# Altium PCB PHY6222_32(0.4)_V1.7.PcbDoc
Units mil, origin at the board's own origin, x right, y up, seen from the top; angles counter-clockwise.
Board outline 2885.32 x 1372.78 mil, 4 copper layers (Top Layer, Signal Layer 1, Signal Layer 2, Bottom Layer), stack 30.634 mil thick; 58 components, 64 nets, 245 pads, 482 vias.
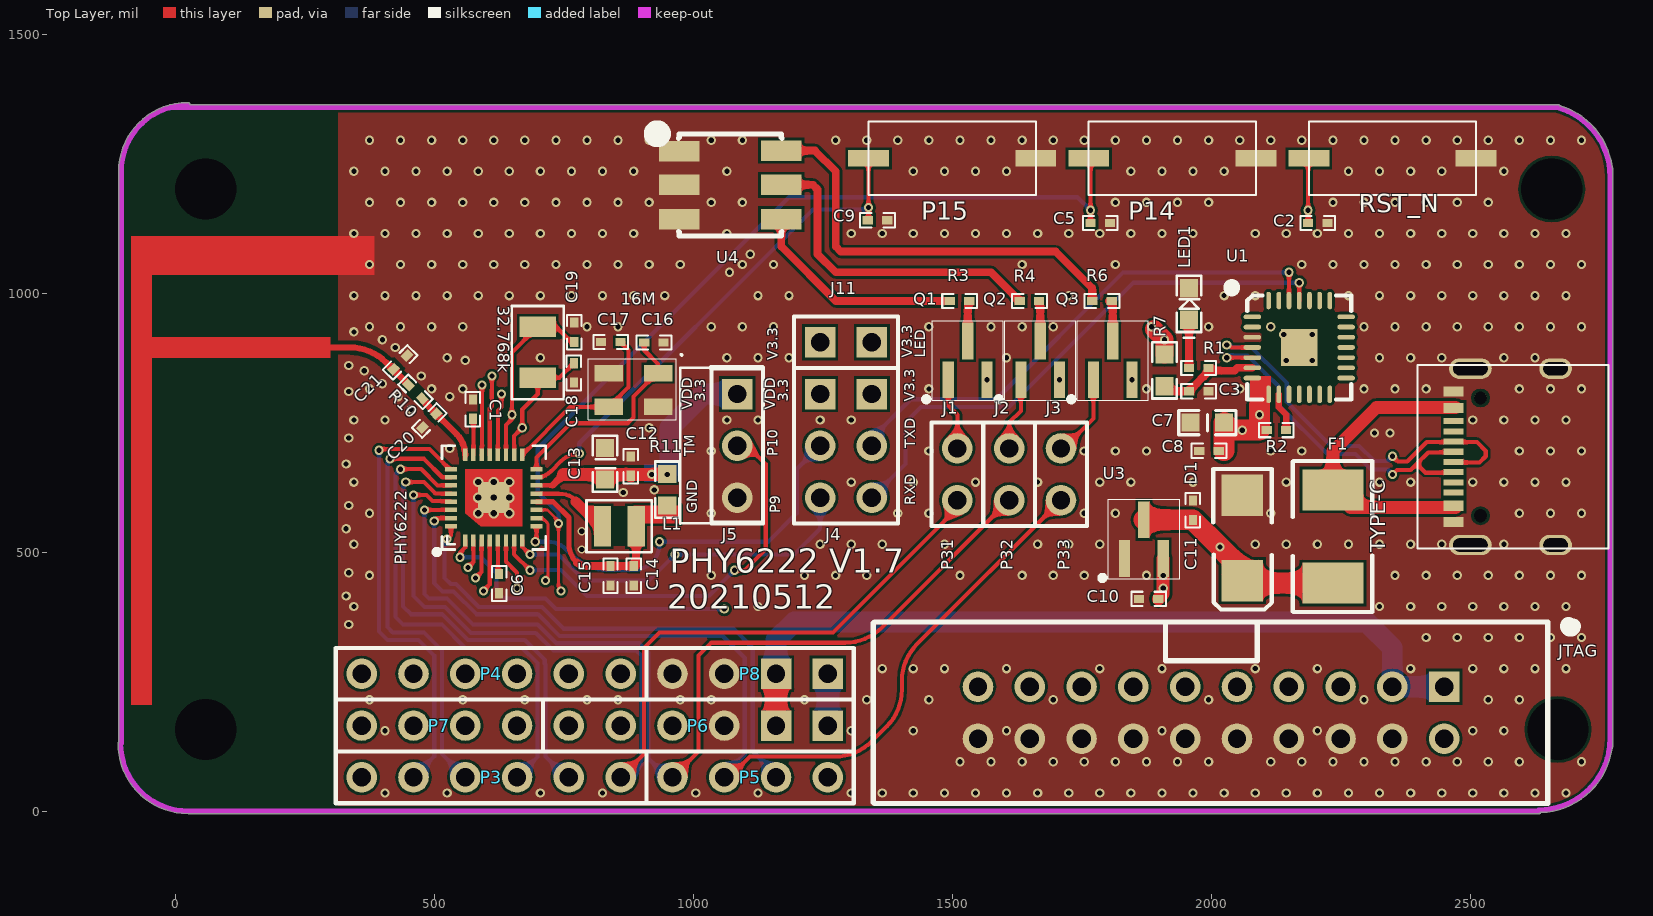
[diagram p0: Top Layer view]
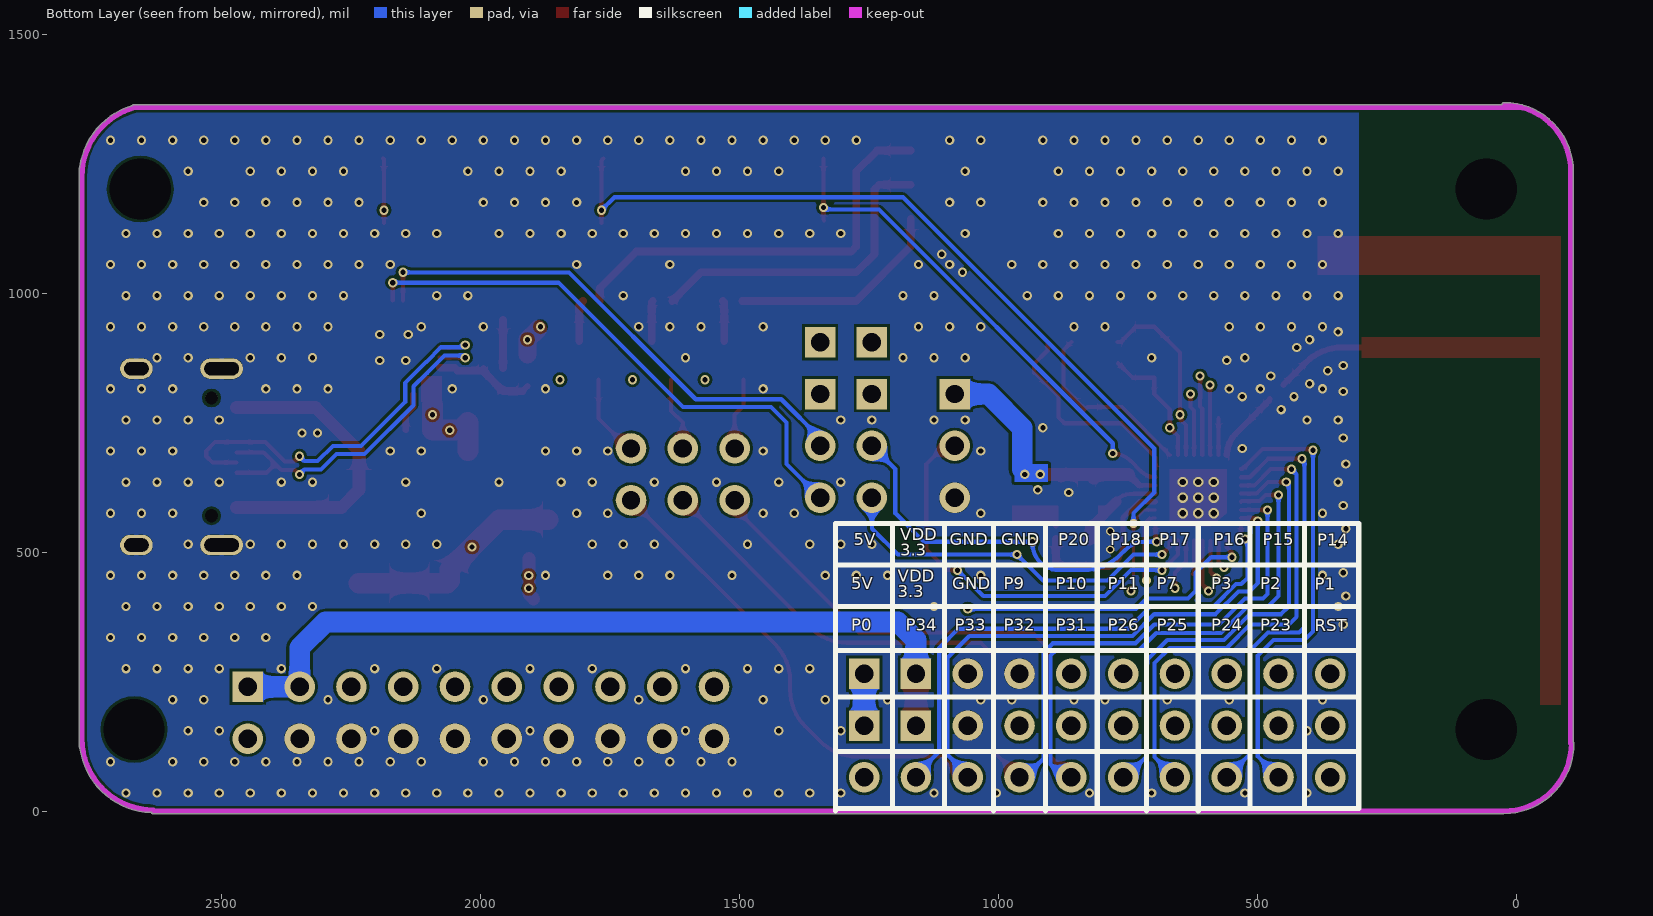
[diagram p1: Bottom Layer view, seen from below]
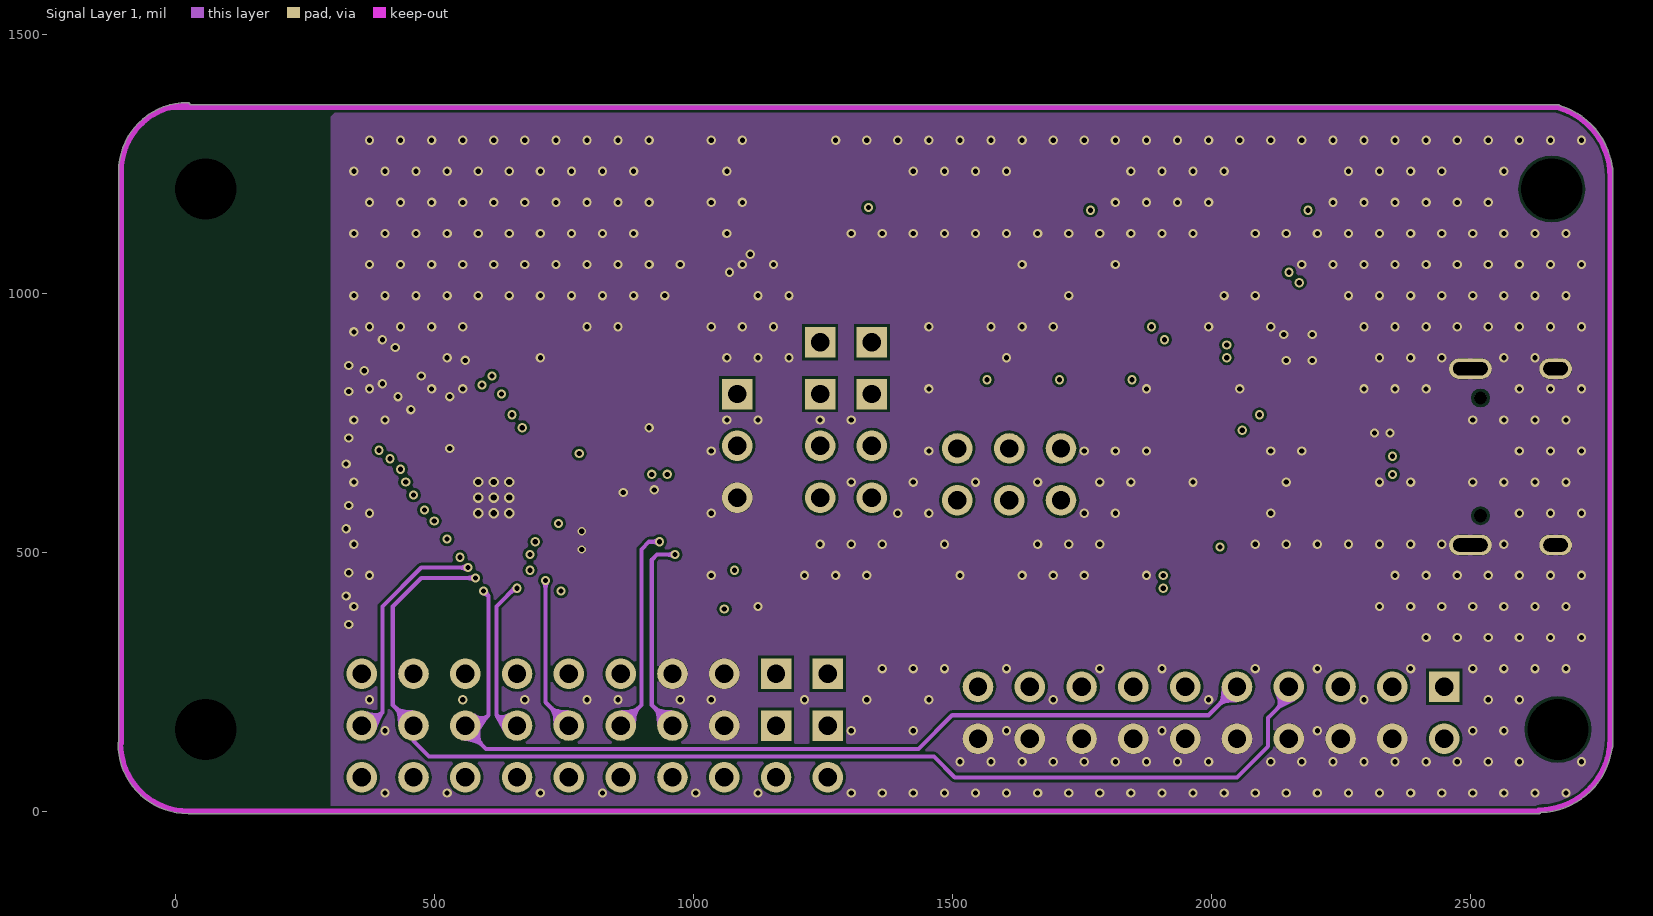
[diagram p2: Signal Layer 1]
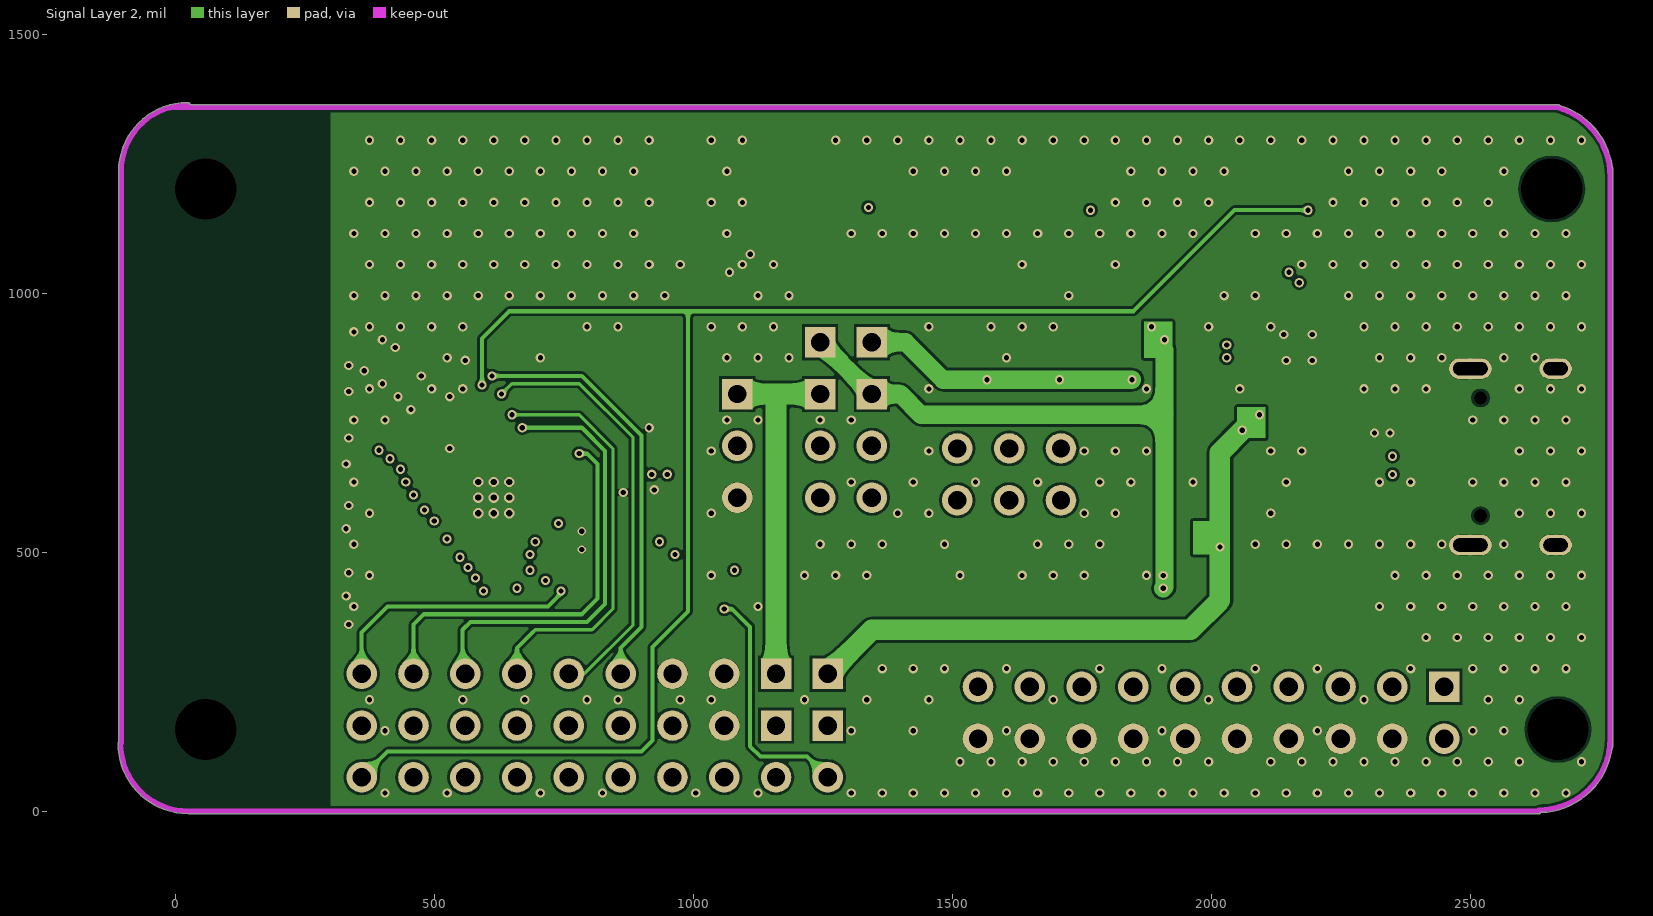
[diagram p3: Signal Layer 2]

## Layer stack, top to bottom
Top Solder: solder mask 0.4, Solder Resist, Dk 3.5
Top Layer: signal copper 1.4
Dielectric 1: core 10, FR-4, Dk 4.2
Signal Layer 1: signal copper 1.417
Dielectric 3: prepreg 5, Dk 4.2
Signal Layer 2: signal copper 1.417
Dielectric 2: core 10, Dk 4.2
Bottom Layer: signal copper 1.4
Bottom Solder: solder mask 0.4, Solder Resist, Dk 3.5

## Board outline
-110.31,130.29 cw(c-105.29,130.29) -109.03,133.64 -109.03,1235 cw(c23.73,1235) -12.03,1362.85 cw(c-10,1358.27) -10.59,1363.25 cw(c23.73,1235) 23.73,1367.76 cw(c23.73,1362.75) 28.72,1363.28 2662.88,1363.28 cw(c2665.13,1358.8) 2666.33,1363.67 cw(c2632.2,1225) 2667.88,1363.28 2670,1363.28 cw(c2670,1358.27) 2673.71,1361.65 cw(c2632.2,1225) 2773.85,1243.22 cw(c2770,1240) 2775.01,1240 2775.01,125 cw(c2770,125) 2773.85,121.78 cw(c2632.2,140) 2636.4,-2.75 cw(c2632.2,0) 2632.2,-5.02 25,-5.02 cw(c25,130.29)

## Design rules (kind name [scope] priority, off if disabled: settings)
Clearance Clearance_2 [All vs InNet('F2')] p1: gap=8
Clearance Clearance_1 [InNet('GND') vs InNet('RF')] p2: gap=8
Clearance [All] p3: gap=5
ComponentClearance [All] p1: gap=10 collisioncheckmode=3 verticalgap=0 showdistances=FALSE
DiffPairsRouting [All] p1: maxlimit=10 minlimit=8 mostfreqgap=10 toplayer_prefgap=8 toplayer_minwidth=8 toplayer_maxwidth=8 toplayer_prefwidth=8 midlayer1_mingap=10 midlayer1_minwidth=15 midlayer1_maxwidth=15 midlayer1_prefwidth=15 midlayer2_mingap=10 midlayer2_minwidth=15 midlayer2_maxwidth=15 midlayer2_prefwidth=15 bottomlayer_prefgap=8 bottomlayer_minwidth=8 bottomlayer_maxwidth=8 bottomlayer_prefwidth=8 maxuncoupledlength=500
HoleSize [All] p1: absolutevalues=TRUE maxlimit=1000 minlimit=1 maxpercent=80.000 minpercent=20.000
MinimumSolderMaskSliver [All] p1: minsoldermaskwidth=0
PlaneConnect [All] p1: planeconnectstyle=Direct reliefexpansion=20 reliefentries=4 reliefconductorwidth=10 reliefairgap=6
PolygonConnect [All vs OnLayer('Top Layer')] p1: connectstyle=Direct reliefconductorwidth=10 reliefentries=4 polygonreliefangle="90 Angle" airgapwidth=6
RoutingCorners [All] p1: cornerstyle=45-Degree minsetback=10 maxsetback=1000
RoutingVias [All] p1: holewidth=28 width=50 viastyle="Through Hole" minholewidth=10 minwidth=15 maxholewidth=28 maxwidth=50
SilkToSilkClearance [All] p1: silktosilkclearance=0
SilkToSolderMaskClearance [IsPad] p1: minsilkscreentomaskgap=0 clearancetoexposedcopper=TRUE
SolderMaskExpansion [All] p1: expansion=4
Width [All] p1: maxlimit=80 minlimit=6 preferedwidth=10
22 further rules are at their usual default settings.

## Classes and differential pairs
component class Sheet1: 2 16M 32.768k C1 C2 C3 C5 C6 C7 C8 C9 C10 C11 C12 C13 C14 C15 C16 C17 C18 C19 C20 C21 CKlink D1 F1 J1 J2 J3 J4 j5 J？1 L1 LED1 P3 P4 P5 P6 P7 P8 P14 P15 PHY6222 Q1 Q2 Q3 R1 R2 R3 R4 R6 RST_N U1 U3 U4
differential pair NewDifferentialPair1: +D+ -D-

## Components (designator, comment, footprint, x,y, rotation, side; value= is the part's Value field where it differs from the comment)
16M "U2" 3225 902.14,850.4 r180 top (schematic designator 1)
32.768k "XTAL" "3215   32.768k" 700,935 r270 top (schematic designator 2)
C1 "0.1uF" C0402 590,740 r90 top
C2 "1uf" C0402 2170,1120 r0 top
C3 "0.1uF" C0402 1940,795 r0 top
C5 "1uf" C0402 1750,1120 r0 top
C6 "0.1uF" C0402 610,475 r270 top
C7 "10uF" 0603R 1960,750 r0 top
C8 "0.1uF" C0402 1960,680 r0 top
C9 "1uf" C0402 1320,1125 r0 top
C10 "1uF" C0402 1915,425 r180 top
C11 "1uF" C0402 1980,545 r90 top
C12 "0.1uF" C0402 895,630 r90 top
C13 "4.7uF" C0603 830,640 r90 top
C14 "2.2uf" C0402 870,490 r270 top
C15 "0.1uF" C0402 825,490 r270 top
C16 "20pF/NC" C0402 960,920 r180 top
C17 "20pF/NC" C0402 805,890 r0 top
C18 "20pF/NC" C0402 785,810 r90 top
C19 "20pF/NC" C0402 755,960 r270 top
C20 "NC" C0402 505,790 r225 top
C21 "NC" C0402 420,830 r45 top
D1 "SMBJ24CA" 1N5819S 2060,610 r270 top
F1 "SMD110" 1812 2235,440 r90 top
J1 "Header 2" HDR1X2#1 1510,600 r90 top
J2 "Header 2" HDR1X2#1 1610,600 r90 top
J3 "Header 2" HDR1X2#1 1710,600 r90 top
J4 "Header 3X2" HDR2X3 1345,605 r90 top (schematic designator P?)
J5 "SW-SPDT" HDR1X3 1085,605 r90 top (schematic designator S1)
J11 "Comment" HDR1X2#2 1245,905 r0 top
JTAG "Comment" JTAG1 1350,365 r270 top locked
L1 "4.7uH" SMD2520 825,550 r0 top
LED1 "LED0（红色）" LED0603 1982.5,923.33 r90 top (schematic designator POWER1)
P3 "MHDR1X6" HDR1X6#1 860,65 r180 top
P4 "Header 6" HDR1X6#1 860,265 r180 top
P5 "MHDR1X4" HDR1X4#1 960,65 r0 top
P6 "MHDR1X6" HDR1X6#2 760,165 r0 top
P7 "MHDR1X4" HDR1X4#1 360,165 r0 top
P8 "Comment" HDR1X4#2 960,265 r0 top
P14 "SW-PB" BUTTOn 1925,1260 r0 top (schematic designator P1)
P15 "SW-PB" BUTTOn 1500,1260 r0 top (schematic designator P2)
PHY6222 "PHY6220" QFN32_0.4 615,605 r90 top locked (schematic designator U2)
Q1 "PMOS-SI2301" SOT-23 1495,830 r0 top
Q2 "PMOS-SI2301" SOT-23 1635,830 r0 top
Q3 "PMOS-SI2301" SOT-23 1775,830 r0 top
R1 "4.7K" R0402 1940,840 r0 top
R2 "4.7k" R0402 2090,720 r0 top
R3 "470" R0402 1550,1000 r180 top
R4 "470" R0402 1685,1000 r180 top
R6 "470" R0402 1825,1000 r180 top
R7 "0/NC" R0603 1910,820 r90 top (schematic designator R5)
R10 "0" R0402 500,795 r135 top (schematic designator R5)
R11 "0" R0603 950,590 r90 top (schematic designator R5)
RST_N "SW-PB" BUTTOn 2350,1260 r0 top (schematic designator RST_N1)
TYPE-C "Comment" TYPE-C 2520,570 r90 top locked
U1 "CP2102" CP2102 2170,895 r0 top
U3 "ME6216" SOT-23 1835,485 r0 top
U4 "LED5050" LED5050 1170,1275 r270 top

## Footprints (in the part's own frame and the unit in brackets; to place one, negate y for a bottom-side part, rotate by r counter-clockwise, add the part's x,y. Pads: shape width x height; smd on the part's side, far side on the other; paste and mask are expansions set on the pad)
1N5819S [mil]
  rect 80x80 smd: 1(0,0) 2(165,0)
  silkscreen extent -50,-56 221,57
0603R [mil]
  rect 35x35 smd: 1(0,0) 2(65,0)
  silkscreen extent -23,-24 88,24
1812 [mm]
  rect 2x3 smd: 1(0,0) 2(4.572,0)
  silkscreen extent -1.42,-1.93 5.99,1.97
"3215   32.768k" [mm]
  rect 1x1.8 smd: 1(0,0) 2(2.5,0)
  silkscreen extent -1.02,-1.27 3.56,1.27
3225 [mil]
  rect 55.12x31.5 smd: 1(-30,5) 2(65,5) 3(65,70) 4(-30,70)
  silkscreen extent -77,-32 105,95
BUTTOn [mm]
  rect 2x0.8 smd: 1(-4.1,0) 2(4.1,0)
  silkscreen extent -4.1,-1.8 4.1,1.8
C0402 [mm]
  rect 0.5x0.4 smd: 1(0.435,0.391) 2(1.385,0.391)
  silkscreen extent 0.06,0.04 1.76,0.74
C0603 [mil]
  rect 35x35 smd: 1(0,0) 2(61.02,0)
  silkscreen extent -24,-24 85,24
CP2102 [mm]
  oval 0.86x0.23 smd: 1(-2.3,1.5) 2(-2.3,1) 3(-2.3,0.5) 4(-2.3,0) 5(-2.3,-0.5) 6(-2.3,-1) 7(-2.3,-1.5) 15(2.3,-1.5) 16(2.3,-1) 17(2.3,-0.5) 18(2.3,0) 19(2.3,0.5) 20(2.3,1) 21(2.3,1.5)
  oval 0.23x0.86 smd: 8(-1.5,-2.3) 9(-1,-2.3) 10(-0.5,-2.3) 11(0,-2.3) 12(0.5,-2.3) 13(1,-2.3) 14(1.5,-2.3) 22(1.5,2.3) 23(1,2.3) 24(0.5,2.3) 25(0,2.3) 26(-0.5,2.3) 27(-1,2.3) 28(-1.5,2.3)
  rect 1.8x1.8 smd: 29(0,0)
  silkscreen extent -3.3,-2.56 2.55,2.96
HDR1X2#1 [mm]
  round 1.5 hole 0.9: 1(0,0) 2(2.54,0)
  silkscreen extent -1.27,-1.27 3.81,1.27
HDR1X2#2 [mm]
  rect 1.5x1.5 hole 0.9: 1(0,0) 2(2.54,0)
  silkscreen extent -1.27,-1.27 3.81,1.27
HDR1X3 [mm]
  round 1.5 hole 0.9: 1(0,0) 2(2.54,0)
  rect 1.5x1.5 hole 0.9: 3(5.08,0)
  silkscreen extent -1.27,-1.27 6.35,1.27
HDR1X4#1 [mm]
  round 1.5 hole 0.9: 1(0,0) 2(2.54,0) 3(5.08,0) 4(7.62,0)
  silkscreen extent -1.27,-1.27 8.89,1.27
HDR1X4#2 [mm]
  round 1.5 hole 0.9: 1(0,0) 2(2.54,0)
  rect 1.5x1.5 hole 0.9: 3(5.08,0) 4(7.62,0)
  silkscreen extent -1.27,-1.27 8.89,1.27
HDR1X6#1 [mm]
  round 1.5 hole 0.9: 1(0,0) 2(2.54,0) 3(5.08,0) 4(7.62,0) 5(10.16,0) 6(12.7,0)
  silkscreen extent -1.27,-1.27 13.97,1.27
HDR1X6#2 [mm]
  round 1.5 hole 0.9: 1(0,0) 2(2.54,0) 3(5.08,0) 4(7.62,0)
  rect 1.5x1.5 hole 0.9: 5(10.16,0) 6(12.7,0)
  silkscreen extent -1.27,-1.27 13.97,1.27
HDR2X3 [mm] "Connector; Header; 3x2 Position"
  round 1.5 hole 0.9: 1(0,0) 2(0,2.54) 3(2.54,0) 4(2.54,2.54)
  rect 1.5x1.5 hole 0.9: 5(5.08,0) 6(5.08,2.54)
  silkscreen extent -1.27,-1.27 6.35,3.81
JTAG1 [mm]
  rect 1.5x1.5 hole 0.9: 1(3.18,27.935)
  round 1.5 hole 0.9: 2(5.72,27.935) 3(3.18,25.395) 4(5.72,25.395) 5(3.18,22.855) 6(5.72,22.855) 7(3.18,20.315) 8(5.72,20.315) 9(3.18,17.775) 10(5.72,17.775) 11(3.18,15.235) 12(5.72,15.235) 13(3.18,12.695) 14(5.72,12.695) 15(3.18,10.155) 16(5.72,10.155) 17(3.18,7.615) 18(5.72,7.615) 19(3.18,5.075) 20(5.72,5.075)
  silkscreen extent 0,-0.06 8.9,34.25
LED0603 [mil]
  rect 35x35 smd: 1(25,25) 2(86.02,25)
  silkscreen extent -10,1 110,49
LED5050 [mm]
  rect 1x2 smd: 1(0,0) 2(0.029,-5) 3(1.68,0) 4(1.68,-5) 5(3.36,0) 6(3.36,-5)
  silkscreen extent -0.99,-6.23 4.18,0.04
QFN32_0.4 [mm]
  rect 0.6x0.22 smd: 1(-2.1,1.4) 2(-2.1,1) 3(-2.1,0.6) 4(-2.1,0.2) 5(-2.1,-0.2) 6(-2.1,-0.6) 7(-2.1,-1) 8(-2.1,-1.4) 17(2.1,-1.4) 18(2.1,-1) 19(2.1,-0.6) 20(2.1,-0.2) 21(2.1,0.2) 22(2.1,0.6) 23(2.1,1) 24(2.1,1.4)
  rect 0.22x0.6 smd: 9(-1.4,-2.1) 10(-1,-2.1) 11(-0.6,-2.1) 12(-0.2,-2.1) 13(0.2,-2.1) 14(0.6,-2.1) 15(1,-2.1) 16(1.4,-2.1) 25(1.4,2.1) 26(1,2.1) 27(0.6,2.1) 28(0.2,2.1) 29(-0.2,2.1) 30(-0.6,2.1) 31(-1,2.1) 32(-1.4,2.1)
  rect 1.524x1.524 smd: 33(0,0)
  Top Layer region: -1.397,0.635 -0.762,1.397 1.397,1.397 1.397,-1.397 -1.397,-1.397
  silkscreen extent -2.79,-2.54 2.54,2.92
R0402 [mm]
  rect 0.5x0.4 smd: 1(0.435,0.391) 2(1.385,0.391)
  silkscreen extent 0.06,0.04 1.76,0.74
R0603 [mil]
  rect 35x35 smd: 1(0,0) 2(61.02,0)
  silkscreen extent -24,-24 85,24
SMD2520 [mm]
  rect 0.85x2 smd: 1(0,0) 2(1.65,0)
  Top Layer pour cut-out: 0.356,0.991 1.27,0.991 1.27,-0.991 0.356,-0.991
  silkscreen extent -0.79,-1.27 2.41,1.27
SOT-23 [mm]
  rect 0.55x1.8 smd: 1(-0.061,0.066) 2(1.839,0.066) 3(0.889,1.966)
  silkscreen extent -1.27,-1.01 2.64,2.97
TYPE-C [mm]
  rect 0.5x1 smd: A1B12(-0.31,1.325) A4B9(0.49,1.325) B1A12(6.09,1.325) B4A9(5.29,1.325)
  rect 0.3x1 smd: A5(1.64,1.325) A6(2.64,1.325) A7(3.14,1.325) A8(4.14,1.325) B5(4.64,1.325) B6(3.64,1.325) B7(2.14,1.325) B8(1.14,1.325)
  round 0.6 hole 0.65: NC(0,0) NC(5.78,0)
  oval 1x2.1 hole 0.65 slot 1.7 at 90 deg: S(-1.435,0.5) S(7.215,0.5)
  oval 1x1.6 hole 0.65 slot 1.2 at 90 deg: S(-1.435,-3.68) S(7.215,-3.68)
  silkscreen extent -1.61,-6.28 7.39,3.1

## Part data
16M: library part 3225
32.768k: "Crystal Oscillator"
C1 C2 C5 C6 C9 C12 C13 C14 C15 C16 C17 C18 C19 C20 C21: library part 电容瓷片
C3 C7 C8 C10 C11: library part Cap, "Capacitor"
D1: library part "D Zener", "Zener Diode"
F1: library part FUSE2, "Fuse"
J1 J2 J3: "Header, 2-Pin"
J4: "Header, 3-Pin, Dual row"
J5: "SPDT Subminiature Toggle Switch, Right Angle Mounting, Vertical Actuation"
L1: library part 电感, "电感"
LED1: library part LED0, "Typical INFRARED GaAs LED"
P3 P4 P6: "Header, 6-Pin"
P5 P7: "Header, 4-Pin"
P14 P15 RST_N: "Switch"
PHY6222: library part QFN32-1202
Q1 Q2 Q3: library part PMOS-2, "P-Channel Power MOSFET"
R1 R2: library part Res2, "Resistor"
R3 R4 R6 R7 R10 R11: library part 电阻贴片
U1: library part cp2102

## Free pads (board coordinates)
  oval 59.06x59.84 hole 118.11 unplated: 0(59.06,157.48) 0(59.06,1200.79) 0(2657.48,1200.79) 0(2669.29,157.48)

## Via types
v1: diameter 18, hole 10, Top Layer to Bottom Layer, tented both sides, 414 vias
v2: diameter 17.72, hole 10, Top Layer to Bottom Layer, tented both sides, 57 vias
v3: diameter 19.68, hole 11.81, Top Layer to Bottom Layer, tented both sides, 9 vias
v4: diameter 16, hole 10, Top Layer to Bottom Layer, tented both sides, 2 vias

## Nets (pads, with @x,y where several pads share a name; then routed paths per layer and width w, separated by ;. In a path a pad name is that pad's centre, name@x,y a point inside that pad or via, vN(x,y) a via of type N, cw(c..) or ccw(c..) an arc to the next point about the centre after c; other vN are vias at no path point)
5V: C7.2 C8.2 C11.1 D1.2 F1.1 P6.6 P8.4 R2.1 U1.7 U1.8 U3.3 | length 1867.4
  Top Layer w40: U3.3 1964.34,562.4 C11.1 v2(2016.74,510) 2060,466.74 D1.2 2065,440 F1.1 ; 2024.54,695.4 2024.54,749.54 C7.2 2039.6,735.4 2093.06,735.4 v2(2093.06,765) 2093.06,783.8
  Signal Layer 2 w40: P8.4 1345,350 1545,350 1960,350 2016.74,406.74 v2(2016.74,510) 2016.74,691.74 v2(2060,735)
  Bottom Layer w40: P6.6 P8.4
D+: TYPE-C.A6 TYPE-C.B6 U1.4 | length 766.2
  Top Layer w8: v2@2034.08,900 2039.08,895 U1.4 ; v2(2350,685) 2360.5,674.5 2378.5,674.5 2416.17,712.17 2512.83,712.17 2530,695 2530,685 2517.8,672.8 TYPE-C.A6@2471.77,672.8
  Bottom Layer w8: v2(2030,900) 2034.5,895.5 2076.63,895.5 2105,867.13 2105.5,867.13 2146,826.63 2146,790 2231,705 2285.5,705 2315,675.5 2340.5,675.5 v2(2350,685)
D-: TYPE-C.A7 TYPE-C.B7 U1.5 | length 709.5
  Top Layer w8: v2(2030,875) 2030.31,875.31 U1.5 ; v2(2350,650) 2358.5,658.5 2385.13,658.5 2396.63,670 ; TYPE-C.B7@2471.77,653.11 2413.52,653.11 2396.63,670 ; TYPE-C.A7@2471.77,692.48 2419.11,692.48 2396.63,670
  Bottom Layer w8: v2(2030,875) 2034.5,879.5 2070,879.5 2104.5,845 2105,845 2130,820 2130,783.37 2224.37,689 2231,689 2278.87,689 2308.37,659.5 2340.5,659.5 v2(2350,650)
DCDC_OUT: C14.1 C15.1 L1.2 PHY6222.12 R11.1 | length 336.8
  Top Layer w10: PHY6222.12 729.34,597.13 760,566.47 760,516.21 ccw(c811.21,516.21) 775,480 ; L1.2 L1.2@889.96,556.83
  Top Layer w15: 775,480 ccw(c792.24,497.24) 792.24,472.86 C15.1 C14.1 ; C14.1@889.96,472.86 L1.2@889.96,525
DCDC_SW: L1.1 PHY6222.13 | length 176.6
  Top Layer w8: PHY6222.13 697.93,612.62 740.51,612.62 cw(c740.51,559.82) 777.84,597.16
  Top Layer w20: 772.84,597.16 L1.1@820,550
  Top Layer w25: L1.1@820,550 L1.1@825,525
F1: 
F2: C21.1 R10.2 | length 186.2
  Top Layer w11.81: 290,895 336.8,895 cw(c336.8,795) 407.51,865.71 R10.2
F3: 
F4: 
F5: 
GND: 16M.2 16M.4 C1.2 C2.2 C3.2 C5.2 C6.2 C7.1 C8.1 C9.2 C10.2 C11.2 C12.2 C13.2 C14.2 C15.2 C16.1 C17.1 C18.1 C19.1 C20.2 C21.2 D1.1 J5.1 JTAG.4 JTAG.6 JTAG.8 JTAG.10 JTAG.12 JTAG.14 JTAG.16 JTAG.18 JTAG.20 LED1.2 P6.4 P8.1 P8.2 P14.2 P15.2 PHY6222.33 RST_N.2 TYPE-C.A1B12 TYPE-C.B1A12 TYPE-C.S U1.3 U1.29 U3.1 U4.2 U4.4 U4.6
  other v1: 405,35 525,35 705,35 825,35 1005,35 1125,35 1305,35 1365,35 1425,35 1485,35 1545,35 1605,35 1665,35 1725,35 1785,35 1845,35 1905,35 1965,35 2025,35 2085,35 2145,35 2205,35 2265,35 2325,35 2385,35 2445,35 2505,35 2565,35 2625,35 2685,35 1515,95 1575,95 1635,95 1695,95 1755,95 1815,95 1875,95 1935,95 1995,95 2115,95 2175,95 2235,95 2295,95 2355,95 2415,95 2475,95 2535,95 2595,95 2715,95 405,155 1305,155 1425,155 1605,155 1905,155 2205,155 2505,155 2565,155 375,215 555,215 675,215 795,215 855,215 975,215 1035,215 1215,215 1335,215 1455,215 1695,215 1995,215 2295,215 2535,215 2595,215 1365,275 1425,275 1485,275 1605,275 1785,275 1905,275 2085,275 2205,275 2385,275 2505,275 2565,275 2625,275 2685,275 2415,335 2475,335 2535,335 2595,335 2655,335 2715,335 335,360 345,395 1125,395 2325,395 2385,395 2445,395 2505,395 2565,395 2625,395 2685,395 330,415 375,455 1035,455 1215,455 1275,455 1335,455 1515,455 1635,455 1695,455 1755,455 1875,455 2355,455 2415,455 2475,455 2535,455 2595,455 2655,455 2715,455 335,460 345,515 1245,515 1305,515 1365,515 1485,515 1665,515 1725,515 1785,515 2085,515 2145,515 2205,515 2265,515 2325,515 2385,515 2445,515 2565,515 330,545 375,575 1035,575 1395,575 1455,575 1755,575 1815,575 2115,575 2595,575 2655,575 2715,575 335,590 865,615 925,620 345,635 1305,635 1425,635 1545,635 1665,635 1785,635 1845,635 1965,635 2145,635 2325,635 2385,635 2505,635 2565,635 2625,635 2685,635 330,670 1035,695 1455,695 1755,695 1815,695 1875,695 2115,695 2175,695 2595,695 2655,695 2715,695 335,720 915,740 345,755 405,755 1065,755 1125,755 1245,755 1305,755 2505,755 2565,755 2625,755 2685,755 455,775 430,800 530,800 335,810 375,815 495,815 555,815 1455,815 1875,815 2055,815 2295,815 2355,815 2415,815 2595,815 2655,815 2715,815 400,825 475,840 365,850 335,860 560,870 525,875 705,875 1065,875 1125,875 1185,875 1605,875 2325,875 2385,875 2445,875 2565,875 2625,875 425,895 400,910 345,925 375,935 435,935 495,935 555,935 795,935 855,935 1035,935 1095,935 1155,935 1455,935 1575,935 1635,935 1695,935 1995,935 2115,935 2295,935 2355,935 2415,935 2475,935 2535,935 2595,935 2655,935 2715,935 345,995 405,995 465,995 525,995 585,995 645,995 705,995 765,995 825,995 885,995 945,995 1125,995 1185,995 1725,995 2025,995 2085,995 2265,995 2325,995 2385,995 2445,995 2505,995 2565,995 2625,995 2685,995 375,1055 435,1055 495,1055 555,1055 615,1055 675,1055 735,1055 795,1055 855,1055 915,1055 975,1055 1095,1055 1155,1055 1635,1055 1815,1055 2175,1055 2235,1055 2295,1055 2355,1055 2415,1055 2475,1055 2535,1055 2595,1055 2655,1055 2715,1055 345,1115 405,1115 465,1115 525,1115 585,1115 645,1115 705,1115 765,1115 825,1115 885,1115 1065,1115 1305,1115 1365,1115 1425,1115 1485,1115 1545,1115 1605,1115 1665,1115 1725,1115 1785,1115 1845,1115 1905,1115 1965,1115 2085,1115 2145,1115 2205,1115 2265,1115 2325,1115 2385,1115 2445,1115 2505,1115 2565,1115 2625,1115 2685,1115 375,1175 435,1175 495,1175 555,1175 615,1175 675,1175 735,1175 795,1175 855,1175 915,1175 1035,1175 1095,1175 1815,1175 1875,1175 1935,1175 1995,1175 2235,1175 2295,1175 2355,1175 2415,1175 2475,1175 2535,1175 345,1235 405,1235 465,1235 525,1235 585,1235 645,1235 705,1235 765,1235 825,1235 885,1235 1065,1235 1425,1235 1485,1235 1545,1235 1605,1235 1845,1235 1905,1235 1965,1235 2025,1235 2265,1235 2325,1235 2385,1235 2445,1235 2565,1235 375,1295 435,1295 495,1295 555,1295 615,1295 675,1295 735,1295 795,1295 855,1295 915,1295 1035,1295 1095,1295 1275,1295 1335,1295 1395,1295 1455,1295 1515,1295 1575,1295 1635,1295 1695,1295 1755,1295 1815,1295 1875,1295 1935,1295 1995,1295 2055,1295 2115,1295 2175,1295 2235,1295 2295,1295 2355,1295 2415,1295 2475,1295 2535,1295 2595,1295 2655,1295 2715,1295
  other v2: 530,700 2315,730 2345,730 2145,870 2195,870 2140,920 2195,920 1070,1040 1110,1075
  other v3: 585,575 615,575 645,575 585,605 615,605 645,605 585,635 615,635 645,635
  other v4: 785,505 785,540
NetC1_1: C1.1 PHY6222.23 | length 70.9
  Top Layer w8: PHY6222.23 575.88,687.93 C1.1@575.88,758.43
NetCZ1_1: F1.2 TYPE-C.A4B9 TYPE-C.B4A9 | length 597.4
  Top Layer w25: TYPE-C.A4B9@2471.77,586.18 2268.82,586.18 F1.2 2235,695 2319.09,779.09 TYPE-C.B4A9@2471.77,779.09
NetJ1_2: J1.2 Q1.1 | length 139.8
  Top Layer w8: Q1.1 1492.6,782.4 1510,765 J1.2
NetJ2_2: J2.2 Q2.1 | length 142
  Top Layer w8: J2.2 1610,750 1632.6,772.6 Q2.1
NetJ3_2: J3.2 Q3.1 | length 161.5
  Top Layer w8: J3.2 1715,700 1772.6,757.6 Q3.1
NetPOWER1_1: LED1.1 R1.1 | length 93.1
  Top Layer w15: R1.1 1957.14,947.97 LED1.1
NetQ1_2: Q1.3 R3.1 | length 78.4
  Top Layer w15: Q1.3 1530,981.74 R3.1
NetQ2_2: Q2.3 R4.1 | length 78.1
  Top Layer w15: R4.1 1670,982.45 Q2.3
NetQ3_2: Q3.3 R6.1 | length 80.2
  Top Layer w15: R6.1@1802.86,984.6 1810,977.45 Q3.3
NetR2_2: R2.2 U1.9 | length 75.2
  Top Layer w12: U1.9 2130.63,779.37 2145,765 2145,735.86 R2.2
NetR3_2: R3.2 U4.5 | length 421.8
  Top Layer w15: U4.5 1170,1090 1275.4,984.6 R3.2
NetR4_2: R4.2 U4.3 | length 626.6
  Top Layer w15: U4.3 1231.14,1208.86 1240,1200 1240,1075 1275,1040 1575.05,1040 R4.2
NetR6_2: R6.2 U4.1 | length 820.3
  Top Layer w15: U4.1 1235,1275 1275,1235 1275,1090 1285,1080 1700,1080 1770.46,1009.54 R6.2
P0: P5.4 PHY6222.1 | length 1083.1
  Top Layer w8: v2(550,490) 550,498.84 559.88,508.72 PHY6222.1
  Signal Layer 2 w8: v2@546.14,486.14 v2(550,490) ; v2(1060,390) 1075,390 1110,355 1110,125 1130,105 1220,105 P5.4
  Bottom Layer w8: v2(550,490) 590,490 620,460 620,425 635,410 715,410 735,390 v2(1060,390)
P00: 
P01: 
P1: P7.1 PHY6222.2 | length 508.1
  Top Layer w8: v2(565,470) 575.63,480.63 PHY6222.2
  Signal Layer 1 w8: P7.1 375,165 400,190 400,395 475,470 v2(565,470)
P02: 
P2: JTAG.7 P7.2 PHY6222.3 | length 2377
  Top Layer w8: v2(580,450) 591.38,461.38 PHY6222.3
  Signal Layer 1 w8: v2(580,450) 475,450 420,395 420,205 P7.2 460,135 490,105 1465,105 1505,65 2050,65 2110,125 2110,180 2149.8,219.8 JTAG.7
  Signal Layer 2 w8: v2@576.14,446.14 v2(580,450)
P03: 
P3: JTAG.9 P7.3 PHY6222.4 | length 1965.8
  Top Layer w8: v2(595,425) 607.13,437.13 PHY6222.4
  Signal Layer 1 w8: v2(595,425) 605,415 605,185 585,165 P7.3 560,160 600,120 1435,120 1500,185 1995,185 JTAG.9
  Signal Layer 2 w8: v2(595,425) v2@598.53,421.47
P7: P7.4 PHY6222.6 | length 421
  Top Layer w8: PHY6222.6 638.62,481.38 660,460 v2(660,430)
  Signal Layer 1 w8: P7.4 640,165 620,185 620,395 660,435 v2(660,430)
P9: J4.2 P6.3 PHY6222.8 | length 1101.3
  Top Layer w8: PHY6222.8 670.12,509.88 v2(685,495)
  Signal Layer 1 w8: P6.3 920,205 920,485 930,495 v2(965,495)
  Bottom Layer w8: v2(685,495) 740,495 790,445 915,445 v2(965,495) 1195,495 1245,545 J4.2
P10: J4.4 P6.2 PHY6222.9 | length 1154.7
  Top Layer w8: v2(695,520) 695.35,520 697.68,522.32 PHY6222.9
  Signal Layer 1 w8: P6.2 900,205 900,505 915,520 v2(935,520)
  Bottom Layer w8: v2(695,520) 718.79,520 cw(c718.79,468.79) 754.99,505.01 765.71,494.29 ccw(c836.42,565) 836.42,465 883.79,465 ccw(c883.79,516.21) 920,480 ccw(c883.79,516.21) 935,516.21 v2(935,520) 1145,520 1200,575 1200,660 J4.4
P11: P6.1 PHY6222.10 | length 450.4
  Top Layer w6: PHY6222.10 701.43,565.63 cw(c701.43,546.43) 715.01,560.01 716.45,558.56 cw(c707.89,550) 720,550 720,457.07 cw(c702.93,457.07) v2(715,445)
  Signal Layer 1 w8: v2(715,445) 715,210 P6.1 P6.1@775,165
P14: C5.1 P4.6 P14.1 PHY6222.11 | length 2264.6
  Top Layer w6: PHY6222.11 718.62,581.38 718.62,581.18 740,559.8 740,437.07
  Top Layer w8: 740,437.07 ccw(c757.07,437.07) v2(745,425) ; P14.1 1767.14,1256.44 v2(1767.14,1160) C5.1
  Signal Layer 1 w8: P4.6 P4.6@360,275
  Signal Layer 2 w8: P4.6 360,345 410,395 720,395 745,420 v2(745,425)
  Bottom Layer w8: v2(740,555) 740,575 700,615 700,700 1185,1185 1742.14,1185 v2(1767.14,1160)
P15: C9.1 P4.5 P15.1 PHY6222.15 | length 1758.6
  Top Layer w8: PHY6222.15 ccw(c697.68,683.69) 725.48,655.89 745.17,675.57 cw(c780,640.74) 755.01,683.19 cw(c780,640.74) v2(780,690) ; C9.1 1338.58,1141.84 v2(1338.58,1165) P15.1
  Signal Layer 2 w8: P4.5 460,360 480,380 785,380 815,410 815,670 795,690 v2(780,690)
  Bottom Layer w8: v2(780,690) 780,710 1231.42,1161.42 1335,1161.42 v2(1338.58,1165)
P16: 32.768k.2 C18.2 P4.4 PHY6222.18 | length 1105.4
  Top Layer w8: PHY6222.18 654.37,724.37 v2(670,740) 670,775 700,805 32.768k.2 741.63,836.57 C18.2
  Signal Layer 2 w8: P4.4 555,270 555,350 570,365 795,365 830,400 830,695 785,740 v2(670,740)
P17: 32.768k.1 C19.2 P4.3 PHY6222.19 | length 1153.4
  Top Layer w8: PHY6222.19 638.62,745 650,756.38 v2(650,765) 650,885 32.768k.1 735,935 764.54,905.46 C19.2
  Signal Layer 2 w6: v2(650,765) 780,765 845,700 845,390 805,350 695,350 690,345
  Signal Layer 2 w8: P4.3 660,315 690,345
P18: P4.2 PHY6222.20 | length 950.6
  Top Layer w8: PHY6222.20 622.87,773.08 630,780.2 v2(630,805)
  Signal Layer 2 w6: v2(630,805) 650,825 780,825 884.01,720.99 884.01,359.01 790,265 P4.2
P20: P4.1 PHY6222.21 | length 967.1
  Top Layer w8: PHY6222.21 607.13,777.13 611.33,781.33 611.33,797 611.14,797.19 611.14,812.81 611.33,813 v2(611.33,840)
  Signal Layer 2 w8: v2(611.33,840) 785,840 900,725 900,355 860,315 P4.1
P23: P3.5 PHY6222.25 | length 883.3
  Top Layer w8: v2(393.43,696.57) 395.71,698.86 491.14,698.86 529.88,660.12 PHY6222.25
  Bottom Layer w8: v2(393.43,696.57) 393.43,346.57 410,330 470,330 500,300 500,105 P3.5
P24: P3.4 PHY6222.26 | length 846.4
  Top Layer w8: v2(415,680) 480,680 515.63,644.37 PHY6222.26
  Bottom Layer w8: v2(415,680) 410,675 410,355 420,345 480,345 515,310 515,110 P3.4
P25: P3.3 PHY6222.27 | length 947.9
  Top Layer w8: v2(435,660) 475,660 506.38,628.62 PHY6222.27
  Bottom Layer w8: v2(435,660) 425,650 425,375 440,360 515,360 560,315 670,315 699.53,285.47 699.53,104.53 P3.3
P26: P3.2 PHY6222.28 | length 903.5
  Top Layer w8: v2(445,635) 480,635 502.13,612.87 PHY6222.28
  Bottom Layer w8: v2(445,635) 440,630 440,395 455,380 515.2,380 565.2,330 674.8,330 713.53,291.27 713.53,285 715,283.53 715,105 755,65 P3.2
P31: J1.1 P3.1 PHY6222.29 | length 2019.6
  Top Layer w8: v2(460,610) 485.2,610 496.66,598.54 530.91,598.54 PHY6222.29 ; P3.1 905,110 905,315 935,345 1270,345 1499.39,574.39 ccw(c1473.79,600) J1.1
  Bottom Layer w8: v2(460,610) 460,415 481,394 521,394 571,344 696,344 730,310 890,310 900,300 900,90 875,65 P3.1
P32: J2.1 P5.1 PHY6222.30 | length 1934.6
  Top Layer w8: v2(481.38,581.38) PHY6222.30 ; P5.1 1010,115 1010,300 1035,325 1293.58,325 ccw(c1293.58,425) 1364.29,354.29 J2.1
  Bottom Layer w8: v2(481.38,581.38) 481.14,581.14 481.14,418.86 490,410 525,410 575,360 700,360 736,324 895.8,324 914,305.8 914,101 950,65 P5.1
P33: J3.1 P5.2 PHY6222.31 | length 1978.3
  Top Layer w8: v2(500,560) 505.63,565.63 PHY6222.31 ; P5.2 1070,65 1110,105 1273.83,105 ccw(c1273.83,205) 1344.54,134.29 1373.57,163.31 ccw(c1302.86,234.02) 1402.86,234.02 1402.86,251.44 cw(c1502.86,251.44) 1432.15,322.15 J3.1
  Bottom Layer w8: v2(500,560) 500,440 516,424 537.62,424 581.62,380 700,380 742,338 1057,338 1099.53,295.47 1099.53,109.53 1060,70 P5.2
P34: P5.3 PHY6222.32 | length 1024.5
  Top Layer w8: v2(525,525) 532.32,532.32 PHY6222.32
  Bottom Layer w8: v2(525,525) 520,520 520,450 532,438 542,438 586,394 708,394 750,352 1078,352 1115,315 1115,115 1160,70 P5.3
RF: C20.1 PHY6222.24 R10.1 | length 140.2
  Top Layer w10: R10.1 ccw(c482.93,796.23) R10.1@478.72,792.04
  Top Layer w11.81: R10.1@478.72,792.04 C20.1 543.48,727.28 cw(c503.88,687.68) PHY6222.24
RST_N: C2.1 P3.6 PHY6222.22 RST_N.1 | length 3495.6
  Top Layer w8: PHY6222.22 592.47,688.77 v2(592.47,822.47) ; C2.1 v2(2187.14,1160) 2187.14,1258.56 RST_N.1
  Signal Layer 2 w8: P3.6 410,115 900,115 921.47,136.47 921.47,316.47 990,385 990,965 ; v2(592.47,822.47) 592.47,912.47 645,965 990,965 ; v2(2187.14,1160) 2045,1160 1850,965 990,965
RXD: J4.1 U1.25 | length 1078.2
  Top Layer w8: U1.25 v2(2170,1020)
  Bottom Layer w8: J4.1 1410,670 1410,750 1440,780 1610,780 1850,1020 v2(2170,1020)
SMA: 
SMA1: 
TM: J5.2 PHY6222.7 | length 817.5
  Top Layer w8: PHY6222.7 654.37,495.63 v2(685,465) ; v2(1080,465) 1100,465 1140,505 1140,670 1105,705 J5.2
  Bottom Layer w8: v2(685,465) 745,465 795,415 1030,415 v2(1080,465)
TXD: J4.3 U1.26 | length 1007.1
  Top Layer w8: v2(2150,1040) 2150.31,1039.69 U1.26
  Bottom Layer w8: J4.3 1345,720 1420,795 1585,795 1830,1040 v2(2150,1040)
V3.3: C10.1 J4.5 J11.1 R7.2 U3.2 | length 1323.3
  Top Layer w25: C10.1 1907.4,419.14 v2(1907.4,430) v2(1907.4,455) U3.2
  Top Layer w35: v2@1890,930 v2(1910,910) R7.2
  Signal Layer 2 w35: J11.1 J4.5 1400,805 1440,765 1910,765 ; v2(1907.4,430) 1910,432.6 1910,765 ; 1910,890 1910,765
  other v2: 1885,935
V3.3_1: C3.1 R1.2 R7.1 U1.6 | length 201.1
  Top Layer w12: R7.1 R7.1@1919.6,810.4 ; R1.2@1994.54,847.81 R1.2 R1.2@1999.95,850
  Top Layer w15: R7.1@1919.6,810.4 C3.1 R1.2@1994.54,847.81 ; R1.2@1999.95,850 2045,850 2050.63,855.63 U1.6
V3.3_LED: J11.2 Q1.2 Q2.2 Q3.2 | length 532.4
  Signal Layer 2 w35: J11.2 1410,905 1482.4,832.6 v2(1567.4,832.6) v2(1707.4,832.6) v2(1847.4,832.6)
VDD3.3: C12.1 C13.1 J4.6 J5.3 JTAG.1 JTAG.3 P6.5 P8.3 PHY6222.14 R11.2 | length 2772.7
  Top Layer w8: PHY6222.14 728.62,628.62
  Top Layer w12: 728.62,628.62 750,650
  Top Layer w25: 750,650 C13.1@820,650 ; C13.1@817.14,643.1 cw(c826.9,643.1) C13.1@820,650 ; C12.1 ccw(c872.7,640.24) C12.1@872.7,650 ; R11.2@939.6,649.54 939.14,650 v1(920,650) C12.1@872.7,650 ; C13.1@820,650 C12.1@872.7,650
  Top Layer w40: P6.5 P8.3
  Signal Layer 2 w30: 1150,805 1160,795
  Signal Layer 2 w40: J5.3 1150,805 J4.6 ; P8.3 1160,795
  Bottom Layer w40: 955,660 955,740 1020,805 J5.3 ; P8.3 1160,330 1195,365 2300,365 2349.8,315.2 JTAG.3 JTAG.1
  other v1: 950,650
VDDDEC: C6.1 PHY6222.5 | length 65.5
  Top Layer w8: PHY6222.5 622.87,460.39 C6.1
XC1: 16M.1 C16.2 PHY6222.16 | length 418.1
  Top Layer w8: PHY6222.16 697.68,682.68 763.72,748.72 873.72,748.72 885,760 885,800 930.4,845.4 16M.1 932.14,862.86 905.46,889.54 C16.2
XC2: 16M.3 C17.2 PHY6222.17 | length 363.9
  Top Layer w8: PHY6222.17 762.44,780 829.28,780 837.14,772.14 16M.3 875,818.26 875,889.95 C17.2
pads on no net: JTAG.2 JTAG.5 JTAG.11 JTAG.13 JTAG.15 JTAG.17 JTAG.19 TYPE-C.A5 TYPE-C.A8 TYPE-C.B5 TYPE-C.B8 TYPE-C.NC U1.1 U1.2 U1.10 U1.11 U1.12 U1.13 U1.14 U1.15 U1.16 U1.17 U1.18 U1.19 U1.20 U1.21 U1.22 U1.23 U1.24 U1.27 U1.28

## Polygon pours and split planes (outlines as drawn)
GND on Top Layer "Bottom Layer-No Net" (solid, remove dead copper, pour order 11): 255,1500 275,1520 2870,1520 2870,-185 2905,-220 2750,-65 290,-65
GND on Signal Layer 1 "Bottom Layer-No Net" (solid, remove dead copper, pour order 15): 325,1365 300,1340 300,-10 2880,-10 2885,-5 2840,40 2840,1465
GND on Signal Layer 2 "Bottom Layer-No Net" (solid, remove dead copper, pour order 17): 300,1385 300,-5 330,-35 370,5 2845,5 2845,1405 2855,1415
GND on Bottom Layer "Bottom Layer-No Net" (solid, remove dead copper, pour order 19): 305,1360 305,-5 2835,-5 2850,10 2820,40 2820,1410

## Keep-outs
Keep-Out Layer:
  lines w10: -105.29,130.29 ccw(c25,130.29) 25,0 2632.2,0 ; -104.02,130.39 -104.02,1235 cw(c23.73,1235) 23.73,1362.75 ; -10,1358.27 2670,1358.27 ; 2632.2,2.2 ccw(c2632.2,140) 2770,140 ; 2665.13,1358.8 cw(c2632.2,1225) 2770,1225 ; 2770,125 2770,1240

## Other copper
Top Layer:
  rectangle net 5V: 2075,790 2115,840
  rectangle net GND: -45,1035 300,1110
  rectangle: -85,205 -45,1110
  rectangle net F2: -45,875 300,915
  rectangle net GND: 255,1035 385,1110
  rectangle net DCDC_OUT: 885,555 975,590
  pour cut-out: 547,669.72 560.95,683.68 682.33,683.68 682.33,542.74 675.72,536.14 550.55,536.14
  pour cut-out: 2096.75,960.92 2098.86,963.03 2246.4,963.03 2246.4,826.97 2239.43,820 2100,820
  pour cut-out: -170,1420 -155,1435 315,1435 315,-55 275,-95 -150,-95 -150,1420 -185,1455
Signal Layer 2:
  rectangle net 5V: 2050,720 2105,780
  rectangle net 5V: 1965,495 2025,560
  rectangle net V3.3: 1870,875 1925,945
Bottom Layer:
  rectangle net VDD3.3: 905,635 970,670

## Silkscreen, mask and mechanical layers (free items; w line width, h text height)
Top Overlay:
  lines w5: 975,555 975.94,555.94 1100,555.94 ; 975,555.94 975,855 975.94,855.94 1090,855.94
  lines w10: 1035,855.94 1134.06,855.94 ; 1037.97,555.94 1134.06,555.94
  text "V3.3" at 1429.61,875 h35 r90
  text "LED" at 1454.61,875 h35 r90
  text "V3.3" at 1169.61,870 h35 r90
  text "3.3" at 1030,790 h35 r90
  text "3.3" at 1190,790 h35 r90
  text "V3.3" at 1434.61,790 h35 r90
  text "VDD" at 1005,775 h35 r90
  text "VDD" at 1165,775 h35 r90
  text "TXD" at 1435,700 h35 r90
  text "TM" at 1010,685 h35 r90
  text "P10" at 1170,685 h35 r90
  text "RXD" at 1435,590 h35 r90
  text "GND" at 1015,575 h35 r90
  text "P9" at 1175,575 h35 r90
  text "P31" at 1510,465 h40 r90
  text "P32" at 1625,465 h40 r90
  text "P33" at 1735,465 h40 r90
  text "PHY6222 V1.7" at 955,445 h80
  text "20210512" at 950,375 h80
Bottom Overlay:
  lines w10: 305,115 1315,115 ; 305,220 1315,220 ; 305,310 1315,310 ; 305,395 1315,395 ; 305,475 1315,475 ; 410,5 410,555 ; 515,5 515,555 ; 615,0 615,550 ; 715,0 715,550 ; 810,5 810,555 ; 910,0 910,550 ; 1010,0 1010,550 ; 1105,5 1105,555 ; 1205,5 1205,555 ; 1310,5 305,5 305,555 1315,555 1315,0
  text "VDD" at 1190,515 h40
  text "P14" at 385,504.67 h40
  text "P15" at 490,505 h40
  text "P16" at 585,505 h40
  text "P17" at 690,505 h40
  text "P18" at 785,505 h40
  text "P20" at 885,505 h40
  text "GND" at 995,505 h40
  text "GND" at 1095,505 h40
  text "5V" at 1280,505 h40
  text "3.3" at 1190,485 h40
  text "VDD" at 1195,435 h40
  text "P1" at 390,419.67 h40
  text "P2" at 495,420 h40
  text "P3" at 590,420 h40
  text "P7" at 695,420 h40
  text "P11" at 790,420 h40
  text "P10" at 890,420 h40
  text "P9" at 990,420 h40
  text "GND" at 1090,420 h40
  text "5V" at 1285,420 h40
  text "3.3" at 1195,405 h40
  text "RST" at 390,339.67 h40
  text "P23" at 495,340 h40
  text "P24" at 590,340 h40
  text "P25" at 695,340 h40
  text "P26" at 790,340 h40
  text "P31" at 890,340 h40
  text "P32" at 990,340 h40
  text "P33" at 1085,340 h40
  text "P34" at 1180,340 h40
  text "P0" at 1285,340 h40